# EAGLE board Qwiic_OLED_1.3in-Panel (EAGLE 9.6.2), part 1 of 2
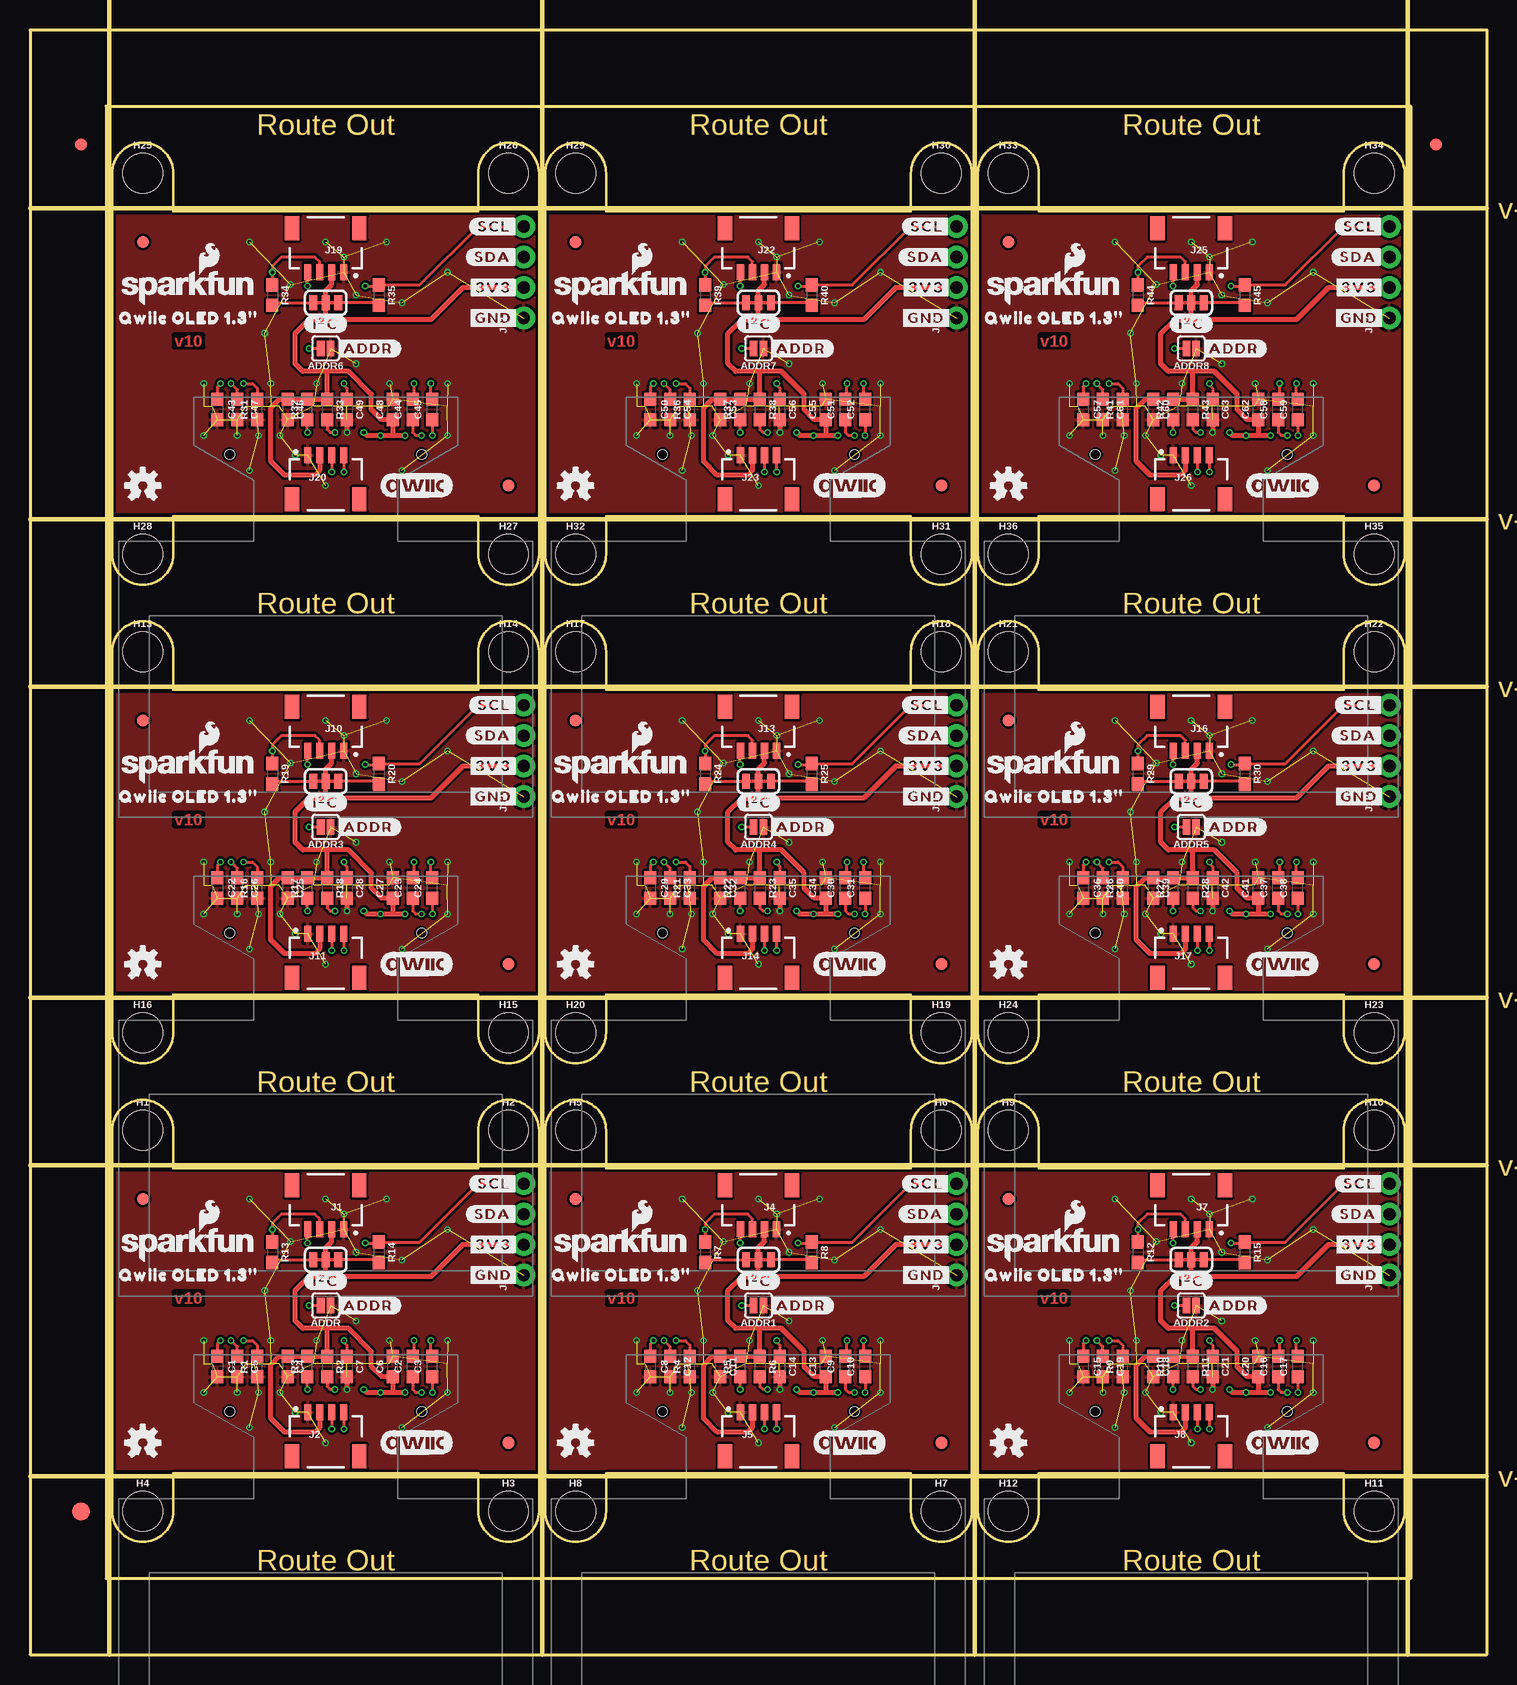
[diagram p0: board, top side]
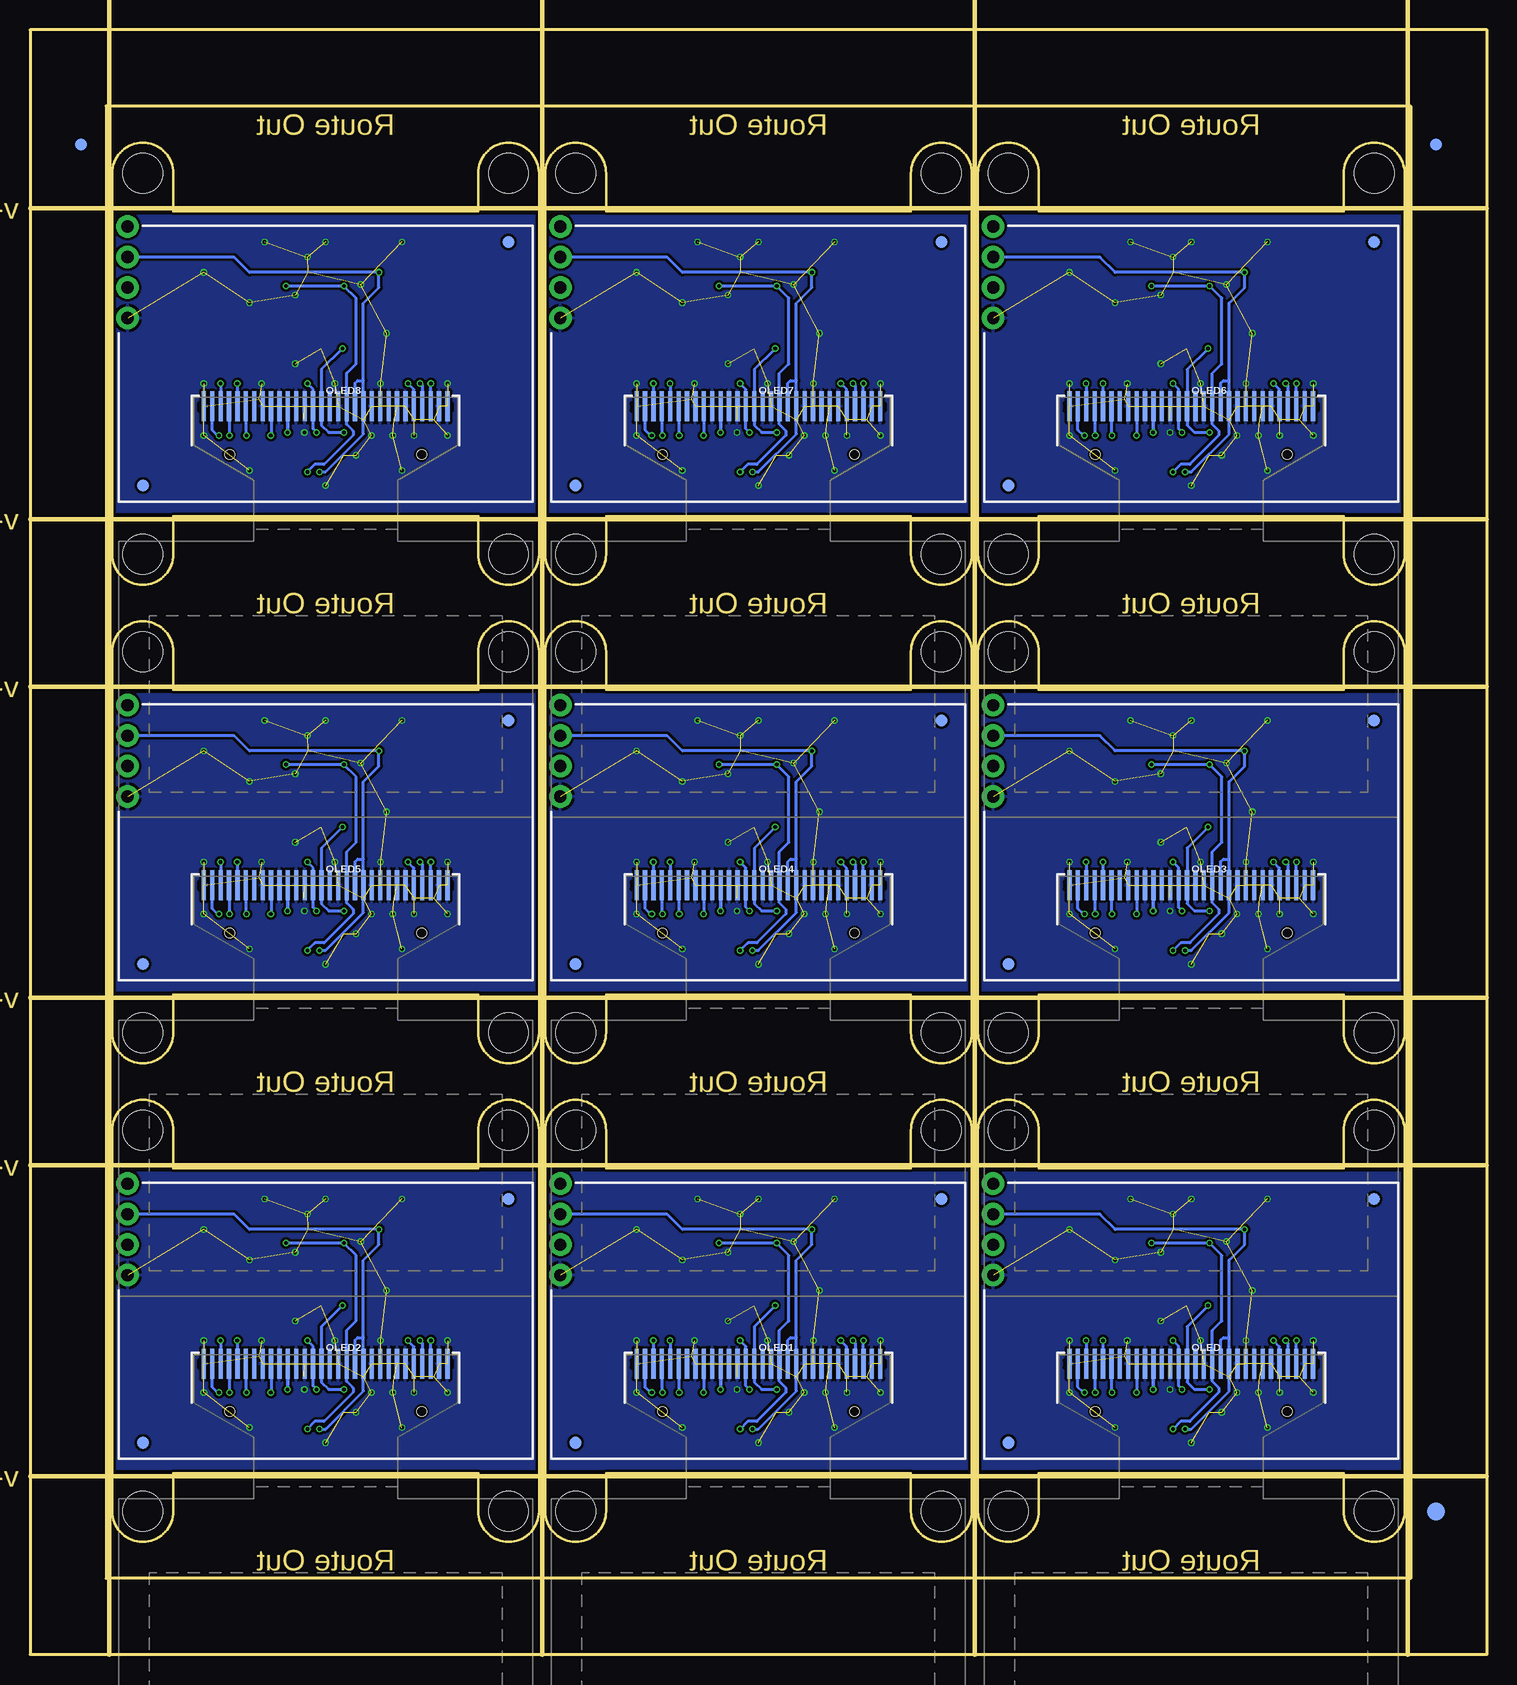
[diagram p1: board, bottom side, seen from below]

Size 121.41 x 135.38 mm. Coordinates in mm from the lower left corner, seen from the top.
Outline: 42.42,11.94 42.42,43.69 arc90 39.88,46.23 arc90 37.34,43.69 37.34,40.51 11.94,40.51 11.94,43.69 arc90 9.4,46.23 arc90 6.86,43.69 6.86,11.94 arc90 9.4,9.4 arc90 11.94,11.94 11.94,15.11 37.34,15.11 37.34,11.94 arc90 39.88,9.4 arc90 42.42,11.94
Outline: 78.49,11.94 78.49,43.69 arc90 75.95,46.23 arc90 73.41,43.69 73.41,40.51 48.01,40.51 48.01,43.69 arc90 45.47,46.23 arc90 42.93,43.69 42.93,11.94 arc90 45.47,9.4 arc90 48.01,11.94 48.01,15.11 73.41,15.11 73.41,11.94 arc90 75.95,9.4 arc90 78.49,11.94
Outline: 114.55,11.94 114.55,43.69 arc90 112.01,46.23 arc90 109.47,43.69 109.47,40.51 84.07,40.51 84.07,43.69 arc90 81.53,46.23 arc90 78.99,43.69 78.99,11.94 arc90 81.53,9.4 arc90 84.07,11.94 84.07,15.11 109.47,15.11 109.47,11.94 arc90 112.01,9.4 arc90 114.55,11.94
Outline: 42.42,51.82 42.42,83.57 arc90 39.88,86.11 arc90 37.34,83.57 37.34,80.39 11.94,80.39 11.94,83.57 arc90 9.4,86.11 arc90 6.86,83.57 6.86,51.82 arc90 9.4,49.28 arc90 11.94,51.82 11.94,54.99 37.34,54.99 37.34,51.82 arc90 39.88,49.28 arc90 42.42,51.82
Outline: 78.49,51.82 78.49,83.57 arc90 75.95,86.11 arc90 73.41,83.57 73.41,80.39 48.01,80.39 48.01,83.57 arc90 45.47,86.11 arc90 42.93,83.57 42.93,51.82 arc90 45.47,49.28 arc90 48.01,51.82 48.01,54.99 73.41,54.99 73.41,51.82 arc90 75.95,49.28 arc90 78.49,51.82
Outline: 114.55,51.82 114.55,83.57 arc90 112.01,86.11 arc90 109.47,83.57 109.47,80.39 84.07,80.39 84.07,83.57 arc90 81.53,86.11 arc90 78.99,83.57 78.99,51.82 arc90 81.53,49.28 arc90 84.07,51.82 84.07,54.99 109.47,54.99 109.47,51.82 arc90 112.01,49.28 arc90 114.55,51.82
Outline: 42.42,91.69 42.42,123.44 arc90 39.88,125.98 arc90 37.34,123.44 37.34,120.27 11.94,120.27 11.94,123.44 arc90 9.4,125.98 arc90 6.86,123.44 6.86,91.69 arc90 9.4,89.15 arc90 11.94,91.69 11.94,94.87 37.34,94.87 37.34,91.69 arc90 39.88,89.15 arc90 42.42,91.69
Outline: 78.49,91.69 78.49,123.44 arc90 75.95,125.98 arc90 73.41,123.44 73.41,120.27 48.01,120.27 48.01,123.44 arc90 45.47,125.98 arc90 42.93,123.44 42.93,91.69 arc90 45.47,89.15 arc90 48.01,91.69 48.01,94.87 73.41,94.87 73.41,91.69 arc90 75.95,89.15 arc90 78.49,91.69
Outline: 114.55,91.69 114.55,123.44 arc90 112.01,125.98 arc90 109.47,123.44 109.47,120.27 84.07,120.27 84.07,123.44 arc90 81.53,125.98 arc90 78.99,123.44 78.99,91.69 arc90 81.53,89.15 arc90 84.07,91.69 84.07,94.87 109.47,94.87 109.47,91.69 arc90 112.01,89.15 arc90 114.55,91.69
Outline: 0,0 121.41,0 121.41,135.38 0,135.38 0,0
Outline: 6.35,6.35 115.06,6.35 115.06,129.03 6.35,129.03 6.35,6.35
Copper layers (1*16): Top 0.035mm / dielectric 1.5mm / Bottom 0.035mm
Design rules "Qwiic_OLED_1.3in": minimum track width 5mil, minimum drill 0.3mm, track to track 5mil, track to pad 5mil, pad to pad 5mil, via to via 5mil, smd to smd 5mil, copper to edge 7mil, drill to drill 7mil, minimum pad ring 5mil, minimum via ring 5mil, stop-mask expansion 2.5mil, vias tented up to drill 25mil, thermal gap 10mil
bRestrict: 81 lines
Milling: 10 lines

## Footprints (pad centres in the part's own frame; a part is rotated, then mirrored left to right if it is on the bottom)
SMT-JUMPER_2_NO_SILK = smd 0.635 x 1.27: 1 -0.406,0; 2 0.406,0
0603 = smd 1.1 x 1: 1 -0.85,0; 2 0.85,0
FIDUCIAL-1X2 = smd 1 x 1: 1 0,0
FIDUCIAL-1.5X3 = smd 1.5 x 1.5: 1 0,0
STAND-OFF = hole 3.302: 0,0
SMT-JUMPER_3_2-NC_TRACE_SILK = smd 0.66 x 1.27: 1 -1.041,0; 2 0,0; 3 1.041,0
JST04_1MM_RA = smd 0.6 x 1.35: 1 -1.5,0; 2 -0.5,0; 3 0.5,0; 4 1.5,0 | smd 1.2 x 2: NC1 2.8,-3.675; NC2 -2.8,-3.675
1X04_NO_SILK = drill 1.016 pad 1.88: 1 0,0; 2 2.54,0; 3 5.08,0; 4 7.62,0
OLED-1.3-128X64 = smd 0.35 x 2.5: 1 -10.15,0.25; 2 -9.45,0.25; 3 -8.75,0.25; 4 -8.05,0.25; 5 -7.35,0.25; 6 -6.65,0.25; 7 -5.95,0.25; 8 -5.25,0.25; 9 -4.55,0.25; 10 -3.85,0.25; 11 -3.15,0.25; 12 -2.45,0.25; 13 -1.75,0.25; 14 -1.05,0.25; 15 -0.35,0.25; 16 0.35,0.25; 17 1.05,0.25; 18 1.75,0.25; 19 2.45,0.25; 20 3.15,0.25; 21 3.85,0.25; 22 4.55,0.25; 23 5.25,0.25; 24 5.95,0.25; 25 6.65,0.25; 26 7.35,0.25; 27 8.05,0.25; 28 8.75,0.25; 29 9.45,0.25; 30 10.15,0.25 | hole 0.8: 8,-3.75; -8,-3.75

## Placement (x,y rotation side)
ADDR  JUMPER-SMT_2_NO_SILK  [SMT-JUMPER_2_NO_SILK]  24.64,29.08 180 top
ADDR1  JUMPER-SMT_2_NO_SILK  [SMT-JUMPER_2_NO_SILK]  60.71,29.08 180 top
ADDR2  JUMPER-SMT_2_NO_SILK  [SMT-JUMPER_2_NO_SILK]  96.77,29.08 180 top
ADDR3  JUMPER-SMT_2_NO_SILK  [SMT-JUMPER_2_NO_SILK]  24.64,68.96 180 top
ADDR4  JUMPER-SMT_2_NO_SILK  [SMT-JUMPER_2_NO_SILK]  60.71,68.96 180 top
ADDR5  JUMPER-SMT_2_NO_SILK  [SMT-JUMPER_2_NO_SILK]  96.77,68.96 180 top
ADDR6  JUMPER-SMT_2_NO_SILK  [SMT-JUMPER_2_NO_SILK]  24.64,108.84 180 top
ADDR7  JUMPER-SMT_2_NO_SILK  [SMT-JUMPER_2_NO_SILK]  60.71,108.84 180 top
ADDR8  JUMPER-SMT_2_NO_SILK  [SMT-JUMPER_2_NO_SILK]  96.77,108.84 180 top
C1  2.2uF  [0603]  15.62,24 270 top
C2  1.0uF  [0603]  31.88,24 90 top
C3  1.0uF  [0603]  33.53,24 90 top
C4  1.0uF  [0603]  21.46,24 270 top
C5  4.7uF  [0603]  17.27,24 270 top
C6  1.0uF  [0603]  30.23,24 90 top
C7  1.0uF  [0603]  26.42,24 270 top
C8  2.2uF  [0603]  51.69,24 270 top
C9  1.0uF  [0603]  67.95,24 90 top
C10  1.0uF  [0603]  69.6,24 90 top
C11  1.0uF  [0603]  57.53,24 270 top
C12  4.7uF  [0603]  53.34,24 270 top
C13  1.0uF  [0603]  66.29,24 90 top
C14  1.0uF  [0603]  62.48,24 270 top
C15  2.2uF  [0603]  87.76,24 270 top
C16  1.0uF  [0603]  104.01,24 90 top
C17  1.0uF  [0603]  105.66,24 90 top
C18  1.0uF  [0603]  93.6,24 270 top
C19  4.7uF  [0603]  89.41,24 270 top
C20  1.0uF  [0603]  102.36,24 90 top
C21  1.0uF  [0603]  98.55,24 270 top
C22  2.2uF  [0603]  15.62,63.88 270 top
C23  1.0uF  [0603]  31.88,63.88 90 top
C24  1.0uF  [0603]  33.53,63.88 90 top
C25  1.0uF  [0603]  21.46,63.88 270 top
C26  4.7uF  [0603]  17.27,63.88 270 top
C27  1.0uF  [0603]  30.23,63.88 90 top
C28  1.0uF  [0603]  26.42,63.88 270 top
C29  2.2uF  [0603]  51.69,63.88 270 top
C30  1.0uF  [0603]  67.95,63.88 90 top
C31  1.0uF  [0603]  69.6,63.88 90 top
C32  1.0uF  [0603]  57.53,63.88 270 top
C33  4.7uF  [0603]  53.34,63.88 270 top
C34  1.0uF  [0603]  66.29,63.88 90 top
C35  1.0uF  [0603]  62.48,63.88 270 top
C36  2.2uF  [0603]  87.76,63.88 270 top
C37  1.0uF  [0603]  104.01,63.88 90 top
C38  1.0uF  [0603]  105.66,63.88 90 top
C39  1.0uF  [0603]  93.6,63.88 270 top
C40  4.7uF  [0603]  89.41,63.88 270 top
C41  1.0uF  [0603]  102.36,63.88 90 top
C42  1.0uF  [0603]  98.55,63.88 270 top
C43  2.2uF  [0603]  15.62,103.76 270 top
C44  1.0uF  [0603]  31.88,103.76 90 top
C45  1.0uF  [0603]  33.53,103.76 90 top
C46  1.0uF  [0603]  21.46,103.76 270 top
C47  4.7uF  [0603]  17.27,103.76 270 top
C48  1.0uF  [0603]  30.23,103.76 90 top
C49  1.0uF  [0603]  26.42,103.76 270 top
C50  2.2uF  [0603]  51.69,103.76 270 top
C51  1.0uF  [0603]  67.95,103.76 90 top
C52  1.0uF  [0603]  69.6,103.76 90 top
C53  1.0uF  [0603]  57.53,103.76 270 top
C54  4.7uF  [0603]  53.34,103.76 270 top
C55  1.0uF  [0603]  66.29,103.76 90 top
C56  1.0uF  [0603]  62.48,103.76 270 top
C57  2.2uF  [0603]  87.76,103.76 270 top
C58  1.0uF  [0603]  104.01,103.76 90 top
C59  1.0uF  [0603]  105.66,103.76 90 top
C60  1.0uF  [0603]  93.6,103.76 270 top
C61  4.7uF  [0603]  89.41,103.76 270 top
C62  1.0uF  [0603]  102.36,103.76 90 top
C63  1.0uF  [0603]  98.55,103.76 270 top
E$1  [FIDUCIAL-1X2]  4.23,125.86 0 top
E$2  [FIDUCIAL-1X2]  4.23,125.86 0 bottom
E$3  [FIDUCIAL-1X2]  117.18,125.86 0 top
E$4  [FIDUCIAL-1X2]  117.18,125.86 0 bottom
E$5  [FIDUCIAL-1.5X3]  4.23,11.94 0 top
E$6  [FIDUCIAL-1.5X3]  4.23,11.94 0 bottom
FID1  FIDUCIAL1X2  [FIDUCIAL-1X2]  39.88,17.65 0 top
FID2  FIDUCIAL1X2  [FIDUCIAL-1X2]  9.4,37.97 0 top
FID3  FIDUCIAL1X2  [FIDUCIAL-1X2]  9.4,37.97 0 bottom
FID4  FIDUCIAL1X2  [FIDUCIAL-1X2]  39.88,17.65 0 bottom
FID5  FIDUCIAL1X2  [FIDUCIAL-1X2]  75.95,17.65 0 top
FID6  FIDUCIAL1X2  [FIDUCIAL-1X2]  45.47,37.97 0 top
FID7  FIDUCIAL1X2  [FIDUCIAL-1X2]  45.47,37.97 0 bottom
FID8  FIDUCIAL1X2  [FIDUCIAL-1X2]  75.95,17.65 0 bottom
FID9  FIDUCIAL1X2  [FIDUCIAL-1X2]  112.01,17.65 0 top
FID10  FIDUCIAL1X2  [FIDUCIAL-1X2]  81.53,37.97 0 top
FID11  FIDUCIAL1X2  [FIDUCIAL-1X2]  81.53,37.97 0 bottom
FID12  FIDUCIAL1X2  [FIDUCIAL-1X2]  112.01,17.65 0 bottom
FID13  FIDUCIAL1X2  [FIDUCIAL-1X2]  39.88,57.53 0 top
FID14  FIDUCIAL1X2  [FIDUCIAL-1X2]  9.4,77.85 0 top
FID15  FIDUCIAL1X2  [FIDUCIAL-1X2]  9.4,77.85 0 bottom
FID16  FIDUCIAL1X2  [FIDUCIAL-1X2]  39.88,57.53 0 bottom
FID17  FIDUCIAL1X2  [FIDUCIAL-1X2]  75.95,57.53 0 top
FID18  FIDUCIAL1X2  [FIDUCIAL-1X2]  45.47,77.85 0 top
FID19  FIDUCIAL1X2  [FIDUCIAL-1X2]  45.47,77.85 0 bottom
FID20  FIDUCIAL1X2  [FIDUCIAL-1X2]  75.95,57.53 0 bottom
FID21  FIDUCIAL1X2  [FIDUCIAL-1X2]  112.01,57.53 0 top
FID22  FIDUCIAL1X2  [FIDUCIAL-1X2]  81.53,77.85 0 top
FID23  FIDUCIAL1X2  [FIDUCIAL-1X2]  81.53,77.85 0 bottom
FID24  FIDUCIAL1X2  [FIDUCIAL-1X2]  112.01,57.53 0 bottom
FID25  FIDUCIAL1X2  [FIDUCIAL-1X2]  39.88,97.41 0 top
FID26  FIDUCIAL1X2  [FIDUCIAL-1X2]  9.4,117.73 0 top
FID27  FIDUCIAL1X2  [FIDUCIAL-1X2]  9.4,117.73 0 bottom
FID28  FIDUCIAL1X2  [FIDUCIAL-1X2]  39.88,97.41 0 bottom
FID29  FIDUCIAL1X2  [FIDUCIAL-1X2]  75.95,97.41 0 top
FID30  FIDUCIAL1X2  [FIDUCIAL-1X2]  45.47,117.73 0 top
FID31  FIDUCIAL1X2  [FIDUCIAL-1X2]  45.47,117.73 0 bottom
FID32  FIDUCIAL1X2  [FIDUCIAL-1X2]  75.95,97.41 0 bottom
FID33  FIDUCIAL1X2  [FIDUCIAL-1X2]  112.01,97.41 0 top
FID34  FIDUCIAL1X2  [FIDUCIAL-1X2]  81.53,117.73 0 top
FID35  FIDUCIAL1X2  [FIDUCIAL-1X2]  81.53,117.73 0 bottom
FID36  FIDUCIAL1X2  [FIDUCIAL-1X2]  112.01,97.41 0 bottom
H1  STAND-OFF  [STAND-OFF]  9.4,43.69 0 top
H2  STAND-OFF  [STAND-OFF]  39.88,43.69 0 top
H3  STAND-OFF  [STAND-OFF]  39.88,11.94 0 top
H4  STAND-OFF  [STAND-OFF]  9.4,11.94 0 top
H5  STAND-OFF  [STAND-OFF]  45.47,43.69 0 top
H6  STAND-OFF  [STAND-OFF]  75.95,43.69 0 top
H7  STAND-OFF  [STAND-OFF]  75.95,11.94 0 top
H8  STAND-OFF  [STAND-OFF]  45.47,11.94 0 top
H9  STAND-OFF  [STAND-OFF]  81.53,43.69 0 top
H10  STAND-OFF  [STAND-OFF]  112.01,43.69 0 top
H11  STAND-OFF  [STAND-OFF]  112.01,11.94 0 top
H12  STAND-OFF  [STAND-OFF]  81.53,11.94 0 top
H13  STAND-OFF  [STAND-OFF]  9.4,83.57 0 top
H14  STAND-OFF  [STAND-OFF]  39.88,83.57 0 top
H15  STAND-OFF  [STAND-OFF]  39.88,51.82 0 top
H16  STAND-OFF  [STAND-OFF]  9.4,51.82 0 top
H17  STAND-OFF  [STAND-OFF]  45.47,83.57 0 top
H18  STAND-OFF  [STAND-OFF]  75.95,83.57 0 top
H19  STAND-OFF  [STAND-OFF]  75.95,51.82 0 top
H20  STAND-OFF  [STAND-OFF]  45.47,51.82 0 top
H21  STAND-OFF  [STAND-OFF]  81.53,83.57 0 top
H22  STAND-OFF  [STAND-OFF]  112.01,83.57 0 top
H23  STAND-OFF  [STAND-OFF]  112.01,51.82 0 top
H24  STAND-OFF  [STAND-OFF]  81.53,51.82 0 top
H25  STAND-OFF  [STAND-OFF]  9.4,123.44 0 top
H26  STAND-OFF  [STAND-OFF]  39.88,123.44 0 top
H27  STAND-OFF  [STAND-OFF]  39.88,91.69 0 top
H28  STAND-OFF  [STAND-OFF]  9.4,91.69 0 top
H29  STAND-OFF  [STAND-OFF]  45.47,123.44 0 top
H30  STAND-OFF  [STAND-OFF]  75.95,123.44 0 top
H31  STAND-OFF  [STAND-OFF]  75.95,91.69 0 top
H32  STAND-OFF  [STAND-OFF]  45.47,91.69 0 top
H33  STAND-OFF  [STAND-OFF]  81.53,123.44 0 top
H34  STAND-OFF  [STAND-OFF]  112.01,123.44 0 top
H35  STAND-OFF  [STAND-OFF]  112.01,91.69 0 top
H36  STAND-OFF  [STAND-OFF]  81.53,91.69 0 top
I2C  JUMPER-SMT_3_2-NC_TRACE_SILK  [SMT-JUMPER_3_2-NC_TRACE_SILK]  24.64,32.89 180 top
I2C1  JUMPER-SMT_3_2-NC_TRACE_SILK  [SMT-JUMPER_3_2-NC_TRACE_SILK]  60.71,32.89 180 top
I2C2  JUMPER-SMT_3_2-NC_TRACE_SILK  [SMT-JUMPER_3_2-NC_TRACE_SILK]  96.77,32.89 180 top
I2C3  JUMPER-SMT_3_2-NC_TRACE_SILK  [SMT-JUMPER_3_2-NC_TRACE_SILK]  24.64,72.77 180 top
I2C4  JUMPER-SMT_3_2-NC_TRACE_SILK  [SMT-JUMPER_3_2-NC_TRACE_SILK]  60.71,72.77 180 top
I2C5  JUMPER-SMT_3_2-NC_TRACE_SILK  [SMT-JUMPER_3_2-NC_TRACE_SILK]  96.77,72.77 180 top
I2C6  JUMPER-SMT_3_2-NC_TRACE_SILK  [SMT-JUMPER_3_2-NC_TRACE_SILK]  24.64,112.65 180 top
I2C7  JUMPER-SMT_3_2-NC_TRACE_SILK  [SMT-JUMPER_3_2-NC_TRACE_SILK]  60.71,112.65 180 top
I2C8  JUMPER-SMT_3_2-NC_TRACE_SILK  [SMT-JUMPER_3_2-NC_TRACE_SILK]  96.77,112.65 180 top
J1  QWIIC_RIGHT_ANGLE  [JST04_1MM_RA]  24.64,35.43 180 top
J2  QWIIC_RIGHT_ANGLE  [JST04_1MM_RA]  24.64,20.19 0 top
J3  [1X04_NO_SILK]  41.15,31.62 90 top
J4  QWIIC_RIGHT_ANGLE  [JST04_1MM_RA]  60.71,35.43 180 top
J5  QWIIC_RIGHT_ANGLE  [JST04_1MM_RA]  60.71,20.19 0 top
J6  [1X04_NO_SILK]  77.22,31.62 90 top
J7  QWIIC_RIGHT_ANGLE  [JST04_1MM_RA]  96.77,35.43 180 top
J8  QWIIC_RIGHT_ANGLE  [JST04_1MM_RA]  96.77,20.19 0 top
J9  [1X04_NO_SILK]  113.28,31.62 90 top
J10  QWIIC_RIGHT_ANGLE  [JST04_1MM_RA]  24.64,75.31 180 top
J11  QWIIC_RIGHT_ANGLE  [JST04_1MM_RA]  24.64,60.07 0 top
J12  [1X04_NO_SILK]  41.15,71.5 90 top
J13  QWIIC_RIGHT_ANGLE  [JST04_1MM_RA]  60.71,75.31 180 top
J14  QWIIC_RIGHT_ANGLE  [JST04_1MM_RA]  60.71,60.07 0 top
J15  [1X04_NO_SILK]  77.22,71.5 90 top
J16  QWIIC_RIGHT_ANGLE  [JST04_1MM_RA]  96.77,75.31 180 top
J17  QWIIC_RIGHT_ANGLE  [JST04_1MM_RA]  96.77,60.07 0 top
J18  [1X04_NO_SILK]  113.28,71.5 90 top
J19  QWIIC_RIGHT_ANGLE  [JST04_1MM_RA]  24.64,115.19 180 top
J20  QWIIC_RIGHT_ANGLE  [JST04_1MM_RA]  24.64,99.95 0 top
J21  [1X04_NO_SILK]  41.15,111.38 90 top
J22  QWIIC_RIGHT_ANGLE  [JST04_1MM_RA]  60.71,115.19 180 top
J23  QWIIC_RIGHT_ANGLE  [JST04_1MM_RA]  60.71,99.95 0 top
J24  [1X04_NO_SILK]  77.22,111.38 90 top
J25  QWIIC_RIGHT_ANGLE  [JST04_1MM_RA]  96.77,115.19 180 top
J26  QWIIC_RIGHT_ANGLE  [JST04_1MM_RA]  96.77,99.95 0 top
J27  [1X04_NO_SILK]  113.28,111.38 90 top
LOGO1  QWIIC_LOGO_6MM  [QWIIC_6MM]  32.26,17.65 0 top
LOGO2  OSHW-LOGOS  [OSHW-LOGO-S]  45.47,17.65 0 top
LOGO3  OSHW-LOGOS  [OSHW-LOGO-S]  9.4,17.65 0 top
LOGO4  SFE_LOGO_NAME_FLAME.1_INCH  [SFE_LOGO_NAME_FLAME_.1]  13.21,34.16 0 top
LOGO5  SFE_LOGO_NAME_FLAME.1_INCH  [SFE_LOGO_NAME_FLAME_.1]  49.28,34.16 0 top
LOGO6  QWIIC_LOGO_6MM  [QWIIC_6MM]  68.33,17.65 0 top
LOGO7  OSHW-LOGOS  [OSHW-LOGO-S]  81.53,17.65 0 top
LOGO8  SFE_LOGO_NAME_FLAME.1_INCH  [SFE_LOGO_NAME_FLAME_.1]  85.34,34.16 0 top
LOGO9  QWIIC_LOGO_6MM  [QWIIC_6MM]  104.39,17.65 0 top
LOGO10  OSHW-LOGOS  [OSHW-LOGO-S]  9.4,57.53 0 top
LOGO11  SFE_LOGO_NAME_FLAME.1_INCH  [SFE_LOGO_NAME_FLAME_.1]  13.21,74.04 0 top
LOGO12  QWIIC_LOGO_6MM  [QWIIC_6MM]  32.26,57.53 0 top
LOGO13  OSHW-LOGOS  [OSHW-LOGO-S]  45.47,57.53 0 top
LOGO14  SFE_LOGO_NAME_FLAME.1_INCH  [SFE_LOGO_NAME_FLAME_.1]  49.28,74.04 0 top
LOGO15  QWIIC_LOGO_6MM  [QWIIC_6MM]  68.33,57.53 0 top
LOGO16  OSHW-LOGOS  [OSHW-LOGO-S]  81.53,57.53 0 top
LOGO17  SFE_LOGO_NAME_FLAME.1_INCH  [SFE_LOGO_NAME_FLAME_.1]  85.34,74.04 0 top
LOGO18  QWIIC_LOGO_6MM  [QWIIC_6MM]  104.39,57.53 0 top
LOGO19  OSHW-LOGOS  [OSHW-LOGO-S]  9.4,97.41 0 top
LOGO20  SFE_LOGO_NAME_FLAME.1_INCH  [SFE_LOGO_NAME_FLAME_.1]  13.21,113.92 0 top
LOGO21  QWIIC_LOGO_6MM  [QWIIC_6MM]  32.26,97.41 0 top
LOGO22  OSHW-LOGOS  [OSHW-LOGO-S]  45.47,97.41 0 top
LOGO23  SFE_LOGO_NAME_FLAME.1_INCH  [SFE_LOGO_NAME_FLAME_.1]  49.28,113.92 0 top
LOGO24  QWIIC_LOGO_6MM  [QWIIC_6MM]  68.33,97.41 0 top
LOGO25  OSHW-LOGOS  [OSHW-LOGO-S]  81.53,97.41 0 top
LOGO26  SFE_LOGO_NAME_FLAME.1_INCH  [SFE_LOGO_NAME_FLAME_.1]  85.34,113.92 0 top
LOGO27  QWIIC_LOGO_6MM  [QWIIC_6MM]  104.39,97.41 0 top
OLED  OLED1.3  [OLED-1.3-128X64]  24.64,24 0 bottom
OLED1  OLED1.3  [OLED-1.3-128X64]  60.71,24 0 bottom
OLED2  OLED1.3  [OLED-1.3-128X64]  96.77,24 0 bottom
OLED3  OLED1.3  [OLED-1.3-128X64]  24.64,63.88 0 bottom
OLED4  OLED1.3  [OLED-1.3-128X64]  60.71,63.88 0 bottom
OLED5  OLED1.3  [OLED-1.3-128X64]  96.77,63.88 0 bottom
OLED6  OLED1.3  [OLED-1.3-128X64]  24.64,103.76 0 bottom
OLED7  OLED1.3  [OLED-1.3-128X64]  60.71,103.76 0 bottom
OLED8  OLED1.3  [OLED-1.3-128X64]  96.77,103.76 0 bottom
R1  390k  [0603]  18.92,24 90 top
R2  10k  [0603]  24.77,24 270 top
R3  10k  [0603]  23.11,24 90 top
R4  390k  [0603]  54.99,24 90 top
R5  10k  [0603]  59.18,24 90 top
R6  10k  [0603]  60.83,24 270 top
R7  2.2k  [0603]  56.26,33.53 270 top
R8  2.2k  [0603]  65.15,33.53 270 top
R9  390k  [0603]  91.06,24 90 top
R10  10k  [0603]  95.25,24 90 top
R11  10k  [0603]  96.9,24 270 top
R12  2.2k  [0603]  92.33,33.53 270 top
R13  2.2k  [0603]  20.19,33.53 270 top
R14  2.2k  [0603]  29.08,33.53 270 top
R15  2.2k  [0603]  101.22,33.53 270 top
R16  390k  [0603]  18.92,63.88 90 top
R17  10k  [0603]  23.11,63.88 90 top
R18  10k  [0603]  24.77,63.88 270 top
R19  2.2k  [0603]  20.19,73.41 270 top
R20  2.2k  [0603]  29.08,73.41 270 top
R21  390k  [0603]  54.99,63.88 90 top
R22  10k  [0603]  59.18,63.88 90 top
R23  10k  [0603]  60.83,63.88 270 top
R24  2.2k  [0603]  56.26,73.41 270 top
R25  2.2k  [0603]  65.15,73.41 270 top
R26  390k  [0603]  91.06,63.88 90 top
R27  10k  [0603]  95.25,63.88 90 top
R28  10k  [0603]  96.9,63.88 270 top
R29  2.2k  [0603]  92.33,73.41 270 top
R30  2.2k  [0603]  101.22,73.41 270 top
R31  390k  [0603]  18.92,103.76 90 top
R32  10k  [0603]  23.11,103.76 90 top
R33  10k  [0603]  24.77,103.76 270 top
R34  2.2k  [0603]  20.19,113.28 270 top
R35  2.2k  [0603]  29.08,113.28 270 top
R36  390k  [0603]  54.99,103.76 90 top
R37  10k  [0603]  59.18,103.76 90 top
R38  10k  [0603]  60.83,103.76 270 top
R39  2.2k  [0603]  56.26,113.28 270 top
R40  2.2k  [0603]  65.15,113.28 270 top
R41  390k  [0603]  91.06,103.76 90 top
R42  10k  [0603]  95.25,103.76 90 top
R43  10k  [0603]  96.9,103.76 270 top
R44  2.2k  [0603]  92.33,113.28 270 top
R45  2.2k  [0603]  101.22,113.28 270 top
U$1  [QWIIC_OLED_1#3##0]  13.21,31.62 0 top
U$2  [#I�C#2]  24.64,31.11 0 top
U$3  [#3V3#2]  38.61,34.16 0 top
U$4  [#ADDR#5]  25.4,29.08 0 top
U$5  [#GND#4]  38.61,31.62 0 top
U$6  [#SCL#0]  40.77,39.24 0 top
U$7  [#SDA#1]  40.77,36.7 0 top
U$8  [QWIIC_OLED_1#3##0]  49.28,31.62 0 top
U$9  [#I�C#2]  60.71,31.11 0 top
U$10  [#3V3#2]  74.68,34.16 0 top
U$11  [#ADDR#5]  61.47,29.08 0 top
U$12  [#GND#4]  74.68,31.62 0 top
U$13  [#SCL#0]  76.84,39.24 0 top
U$14  [#SDA#1]  76.84,36.7 0 top
U$15  [QWIIC_OLED_1#3##0]  85.34,31.62 0 top
U$16  [#I�C#2]  96.77,31.11 0 top
U$17  [#3V3#2]  110.74,34.16 0 top
U$18  [#ADDR#5]  97.54,29.08 0 top
U$19  [#GND#4]  110.74,31.62 0 top
U$20  [#SCL#0]  112.9,39.24 0 top
U$21  [#SDA#1]  112.9,36.7 0 top
U$22  [QWIIC_OLED_1#3##0]  13.21,71.5 0 top
U$23  [#I�C#2]  24.64,70.99 0 top
U$24  [#3V3#2]  38.61,74.04 0 top
U$25  [#ADDR#5]  25.4,68.96 0 top
U$26  [#GND#4]  38.61,71.5 0 top
U$27  [#SCL#0]  40.77,79.12 0 top
U$28  [#SDA#1]  40.77,76.58 0 top
U$29  [QWIIC_OLED_1#3##0]  49.28,71.5 0 top
U$30  [#I�C#2]  60.71,70.99 0 top
U$31  [#3V3#2]  74.68,74.04 0 top
U$32  [#ADDR#5]  61.47,68.96 0 top
U$33  [#GND#4]  74.68,71.5 0 top
U$34  [#SCL#0]  76.84,79.12 0 top
U$35  [#SDA#1]  76.84,76.58 0 top
U$36  [QWIIC_OLED_1#3##0]  85.34,71.5 0 top
U$37  [#I�C#2]  96.77,70.99 0 top
U$38  [#3V3#2]  110.74,74.04 0 top
U$39  [#ADDR#5]  97.54,68.96 0 top
U$40  [#GND#4]  110.74,71.5 0 top
U$41  [#SCL#0]  112.9,79.12 0 top
U$42  [#SDA#1]  112.9,76.58 0 top
U$43  [QWIIC_OLED_1#3##0]  13.21,111.38 0 top
U$44  [#I�C#2]  24.64,110.87 0 top
U$45  [#3V3#2]  38.61,113.92 0 top
U$46  [#ADDR#5]  25.4,108.84 0 top
U$47  [#GND#4]  38.61,111.38 0 top
U$48  [#SCL#0]  40.77,119 0 top
U$49  [#SDA#1]  40.77,116.46 0 top
U$50  [QWIIC_OLED_1#3##0]  49.28,111.38 0 top
U$51  [#I�C#2]  60.71,110.87 0 top
U$52  [#3V3#2]  74.68,113.92 0 top
U$53  [#ADDR#5]  61.47,108.84 0 top
U$54  [#GND#4]  74.68,111.38 0 top
U$55  [#SCL#0]  76.84,119 0 top
U$56  [#SDA#1]  76.84,116.46 0 top
U$57  [QWIIC_OLED_1#3##0]  85.34,111.38 0 top
U$58  [#I�C#2]  96.77,110.87 0 top
U$59  [#3V3#2]  110.74,113.92 0 top
U$60  [#ADDR#5]  97.54,108.84 0 top
U$61  [#GND#4]  110.74,111.38 0 top
U$62  [#SCL#0]  112.9,119 0 top
U$63  [#SDA#1]  112.9,116.46 0 top

## Library data of the parts
ADDR ADDR1-ADDR8 I2C I2C1-I2C8 = SparkFun-Jumpers
C1 C8 C15 C22 C29 C36 C43 C50 C57 = SparkFun-Capacitors; PROD_ID: CAP-07888
C2-C4 C6 C7 C9-C11 C13 C14 C16-C18 C20 C21 C23-C25 C27 C28 C30-C32 C34 C35 C37-C39 C41 C42 C44-C46 C48 C49 C51-C53 C55 C56 C58-C60 C62 C63 = SparkFun-Capacitors; PROD_ID: CAP-13930
C5 C12 C19 C26 C33 C40 C47 C54 C61 = SparkFun-Capacitors; PROD_ID: CAP-14106
E$1-E$4 FID1-FID36 LOGO1-LOGO27 = SparkFun-Aesthetics
E$5 E$6 = SparkFun-Retired
H1-H36 = SparkFun-Hardware
J1 J2 J4 J5 J7 J8 J10 J11 J13 J14 J16 J17 J19 J20 J22 J23 J25 J26 = SparkFun-Connectors; PROD_ID: CONN-13694
J3 J6 J9 J12 J15 J18 J21 J24 J27 = SparkX
OLED OLED1-OLED8 = OLED_1.3in; PROD_ID: LCD-19994
R1 R4 R9 R16 R21 R26 R31 R36 R41 = SparkFun-Resistors; PROD_ID: RES-12024
R2 R3 R5 R6 R10 R11 R17 R18 R22 R23 R27 R28 R32 R33 R37 R38 R42 R43 = SparkFun-Resistors; PROD_ID: RES-00824
R7 R8 R12-R15 R19 R20 R24 R25 R29 R30 R34 R35 R39 R40 R44 R45 = SparkFun-Resistors; PROD_ID: RES-08272
U$1-U$63 = output

## Nets
!RESET!: C7.1 OLED.14 R2.2
!RESET!1: C14.1 OLED1.14 R6.2
!RESET!2: C21.1 OLED2.14 R11.2
!RESET!3: C28.1 OLED3.14 R18.2
!RESET!4: C35.1 OLED4.14 R23.2
!RESET!5: C42.1 OLED5.14 R28.2
!RESET!6: C49.1 OLED6.14 R33.2
!RESET!7: C56.1 OLED7.14 R38.2
!RESET!8: C63.1 OLED8.14 R43.2
C1N: C2.2 OLED.5
C1N1: C9.2 OLED1.5
C1N2: C16.2 OLED2.5
C1N3: C23.2 OLED3.5
C1N4: C30.2 OLED4.5
C1N5: C37.2 OLED5.5
C1N6: C44.2 OLED6.5
C1N7: C51.2 OLED7.5
C1N8: C58.2 OLED8.5
C1P: C2.1 OLED.4
C1P1: C9.1 OLED1.4
C1P2: C16.1 OLED2.4
C1P3: C23.1 OLED3.4
C1P4: C30.1 OLED4.4
C1P5: C37.1 OLED5.4
C1P6: C44.1 OLED6.4
C1P7: C51.1 OLED7.4
C1P8: C58.1 OLED8.4
C2N: C3.2 OLED.3
C2N1: C10.2 OLED1.3
C2N2: C17.2 OLED2.3
C2N3: C24.2 OLED3.3
C2N4: C31.2 OLED4.3
C2N5: C38.2 OLED5.3
C2N6: C45.2 OLED6.3
C2N7: C52.2 OLED7.3
C2N8: C59.2 OLED8.3
C2P: C3.1 OLED.2
C2P1: C10.1 OLED1.2
C2P2: C17.1 OLED2.2
C2P3: C24.1 OLED3.2
C2P4: C31.1 OLED4.2
C2P5: C38.1 OLED5.2
C2P6: C45.1 OLED6.2
C2P7: C52.1 OLED7.2
C2P8: C59.1 OLED8.2
D/!C!: ADDR.2 OLED.15 R3.1
D/!C!1: ADDR1.2 OLED1.15 R5.1
D/!C!2: ADDR2.2 OLED2.15 R10.1
D/!C!3: ADDR3.2 OLED3.15 R17.1
D/!C!4: ADDR4.2 OLED4.15 R22.1
D/!C!5: ADDR5.2 OLED5.15 R27.1
D/!C!6: ADDR6.2 OLED6.15 R32.1
D/!C!7: ADDR7.2 OLED7.15 R37.1
D/!C!8: ADDR8.2 OLED8.15 R42.1
GND: ADDR.1 C1.2 C4.2 C5.2 C6.2 C7.2 J1.1 J2.1 J3.1 OLED.1 OLED.8 OLED.10 OLED.12 OLED.13 OLED.16 OLED.17 OLED.21 OLED.22 OLED.23 OLED.24 OLED.25 OLED.29 OLED.30 R1.1
GND1: ADDR1.1 C8.2 C11.2 C12.2 C13.2 C14.2 J4.1 J5.1 J6.1 OLED1.1 OLED1.8 OLED1.10 OLED1.12 OLED1.13 OLED1.16 OLED1.17 OLED1.21 OLED1.22 OLED1.23 OLED1.24 OLED1.25 OLED1.29 OLED1.30 R4.1
GND2: ADDR2.1 C15.2 C18.2 C19.2 C20.2 C21.2 J7.1 J8.1 J9.1 OLED2.1 OLED2.8 OLED2.10 OLED2.12 OLED2.13 OLED2.16 OLED2.17 OLED2.21 OLED2.22 OLED2.23 OLED2.24 OLED2.25 OLED2.29 OLED2.30 R9.1
GND3: ADDR3.1 C22.2 C25.2 C26.2 C27.2 C28.2 J10.1 J11.1 J12.1 OLED3.1 OLED3.8 OLED3.10 OLED3.12 OLED3.13 OLED3.16 OLED3.17 OLED3.21 OLED3.22 OLED3.23 OLED3.24 OLED3.25 OLED3.29 OLED3.30 R16.1
GND4: ADDR4.1 C29.2 C32.2 C33.2 C34.2 C35.2 J13.1 J14.1 J15.1 OLED4.1 OLED4.8 OLED4.10 OLED4.12 OLED4.13 OLED4.16 OLED4.17 OLED4.21 OLED4.22 OLED4.23 OLED4.24 OLED4.25 OLED4.29 OLED4.30 R21.1
GND5: ADDR5.1 C36.2 C39.2 C40.2 C41.2 C42.2 J16.1 J17.1 J18.1 OLED5.1 OLED5.8 OLED5.10 OLED5.12 OLED5.13 OLED5.16 OLED5.17 OLED5.21 OLED5.22 OLED5.23 OLED5.24 OLED5.25 OLED5.29 OLED5.30 R26.1
GND6: ADDR6.1 C43.2 C46.2 C47.2 C48.2 C49.2 J19.1 J20.1 J21.1 OLED6.1 OLED6.8 OLED6.10 OLED6.12 OLED6.13 OLED6.16 OLED6.17 OLED6.21 OLED6.22 OLED6.23 OLED6.24 OLED6.25 OLED6.29 OLED6.30 R31.1
GND7: ADDR7.1 C50.2 C53.2 C54.2 C55.2 C56.2 J22.1 J23.1 J24.1 OLED7.1 OLED7.8 OLED7.10 OLED7.12 OLED7.13 OLED7.16 OLED7.17 OLED7.21 OLED7.22 OLED7.23 OLED7.24 OLED7.25 OLED7.29 OLED7.30 R36.1
GND8: ADDR8.1 C57.2 C60.2 C61.2 C62.2 C63.2 J25.1 J26.1 J27.1 OLED8.1 OLED8.8 OLED8.10 OLED8.12 OLED8.13 OLED8.16 OLED8.17 OLED8.21 OLED8.22 OLED8.23 OLED8.24 OLED8.25 OLED8.29 OLED8.30 R41.1
IREF: OLED.26 R1.2
IREF1: OLED1.26 R4.2
IREF2: OLED2.26 R9.2
IREF3: OLED3.26 R16.2
IREF4: OLED4.26 R21.2
IREF5: OLED5.26 R26.2
IREF6: OLED6.26 R31.2
IREF7: OLED7.26 R36.2
IREF8: OLED8.26 R41.2
N$1: I2C1.3 R7.2
N$2: I2C1.1 R8.2
N$3: I2C2.3 R12.2
N$4: I2C.3 R13.2
N$5: I2C.1 R14.2
N$6: I2C2.1 R15.2
N$7: I2C3.3 R19.2
N$8: I2C3.1 R20.2
N$9: I2C4.3 R24.2
N$10: I2C4.1 R25.2
N$11: I2C5.3 R29.2
N$12: I2C5.1 R30.2
N$13: I2C6.3 R34.2
N$14: I2C6.1 R35.2
N$15: I2C7.3 R39.2
N$16: I2C7.1 R40.2
N$17: I2C8.3 R44.2
N$18: I2C8.1 R45.2
SCL: J1.4 J2.4 J3.4 OLED.18 R14.1
SCL1: J4.4 J5.4 J6.4 OLED1.18 R8.1
SCL2: J7.4 J8.4 J9.4 OLED2.18 R15.1
SCL3: J10.4 J11.4 J12.4 OLED3.18 R20.1
SCL4: J13.4 J14.4 J15.4 OLED4.18 R25.1
SCL5: J16.4 J17.4 J18.4 OLED5.18 R30.1
SCL6: J19.4 J20.4 J21.4 OLED6.18 R35.1
SCL7: J22.4 J23.4 J24.4 OLED7.18 R40.1
SCL8: J25.4 J26.4 J27.4 OLED8.18 R45.1
SDA: J1.3 J2.3 J3.3 OLED.19 OLED.20 R13.1
SDA1: J4.3 J5.3 J6.3 OLED1.19 OLED1.20 R7.1
SDA2: J7.3 J8.3 J9.3 OLED2.19 OLED2.20 R12.1
SDA3: J10.3 J11.3 J12.3 OLED3.19 OLED3.20 R19.1
SDA4: J13.3 J14.3 J15.3 OLED4.19 OLED4.20 R24.1
SDA5: J16.3 J17.3 J18.3 OLED5.19 OLED5.20 R29.1
SDA6: J19.3 J20.3 J21.3 OLED6.19 OLED6.20 R34.1
SDA7: J22.3 J23.3 J24.3 OLED7.19 OLED7.20 R39.1
SDA8: J25.3 J26.3 J27.3 OLED8.19 OLED8.20 R44.1
VCC: C1.1 OLED.28
VCC1: C8.1 OLED1.28
VCC2: C15.1 OLED2.28
VCC3: C22.1 OLED3.28
VCC4: C29.1 OLED4.28
VCC5: C36.1 OLED5.28
VCC6: C43.1 OLED6.28
VCC7: C50.1 OLED7.28
VCC8: C57.1 OLED8.28
VCOMH: C5.1 OLED.27
VCOMH1: C12.1 OLED1.27
VCOMH2: C19.1 OLED2.27
VCOMH3: C26.1 OLED3.27
VCOMH4: C33.1 OLED4.27
VCOMH5: C40.1 OLED5.27
VCOMH6: C47.1 OLED6.27
VCOMH7: C54.1 OLED7.27
VCOMH8: C61.1 OLED8.27
VDD: C4.1 C6.1 I2C.2 J1.2 J2.2 J3.2 OLED.6 OLED.9 OLED.11 R2.1 R3.2
VDD1: C11.1 C13.1 I2C1.2 J4.2 J5.2 J6.2 OLED1.6 OLED1.9 OLED1.11 R5.2 R6.1
VDD2: C18.1 C20.1 I2C2.2 J7.2 J8.2 J9.2 OLED2.6 OLED2.9 OLED2.11 R10.2 R11.1
VDD3: C25.1 C27.1 I2C3.2 J10.2 J11.2 J12.2 OLED3.6 OLED3.9 OLED3.11 R17.2 R18.1
VDD4: C32.1 C34.1 I2C4.2 J13.2 J14.2 J15.2 OLED4.6 OLED4.9 OLED4.11 R22.2 R23.1
VDD5: C39.1 C41.1 I2C5.2 J16.2 J17.2 J18.2 OLED5.6 OLED5.9 OLED5.11 R27.2 R28.1
VDD6: C46.1 C48.1 I2C6.2 J19.2 J20.2 J21.2 OLED6.6 OLED6.9 OLED6.11 R32.2 R33.1
VDD7: C53.1 C55.1 I2C7.2 J22.2 J23.2 J24.2 OLED7.6 OLED7.9 OLED7.11 R37.2 R38.1
VDD8: C60.1 C62.1 I2C8.2 J25.2 J26.2 J27.2 OLED8.6 OLED8.9 OLED8.11 R42.2 R43.1